# Allegro board AC7200.brd
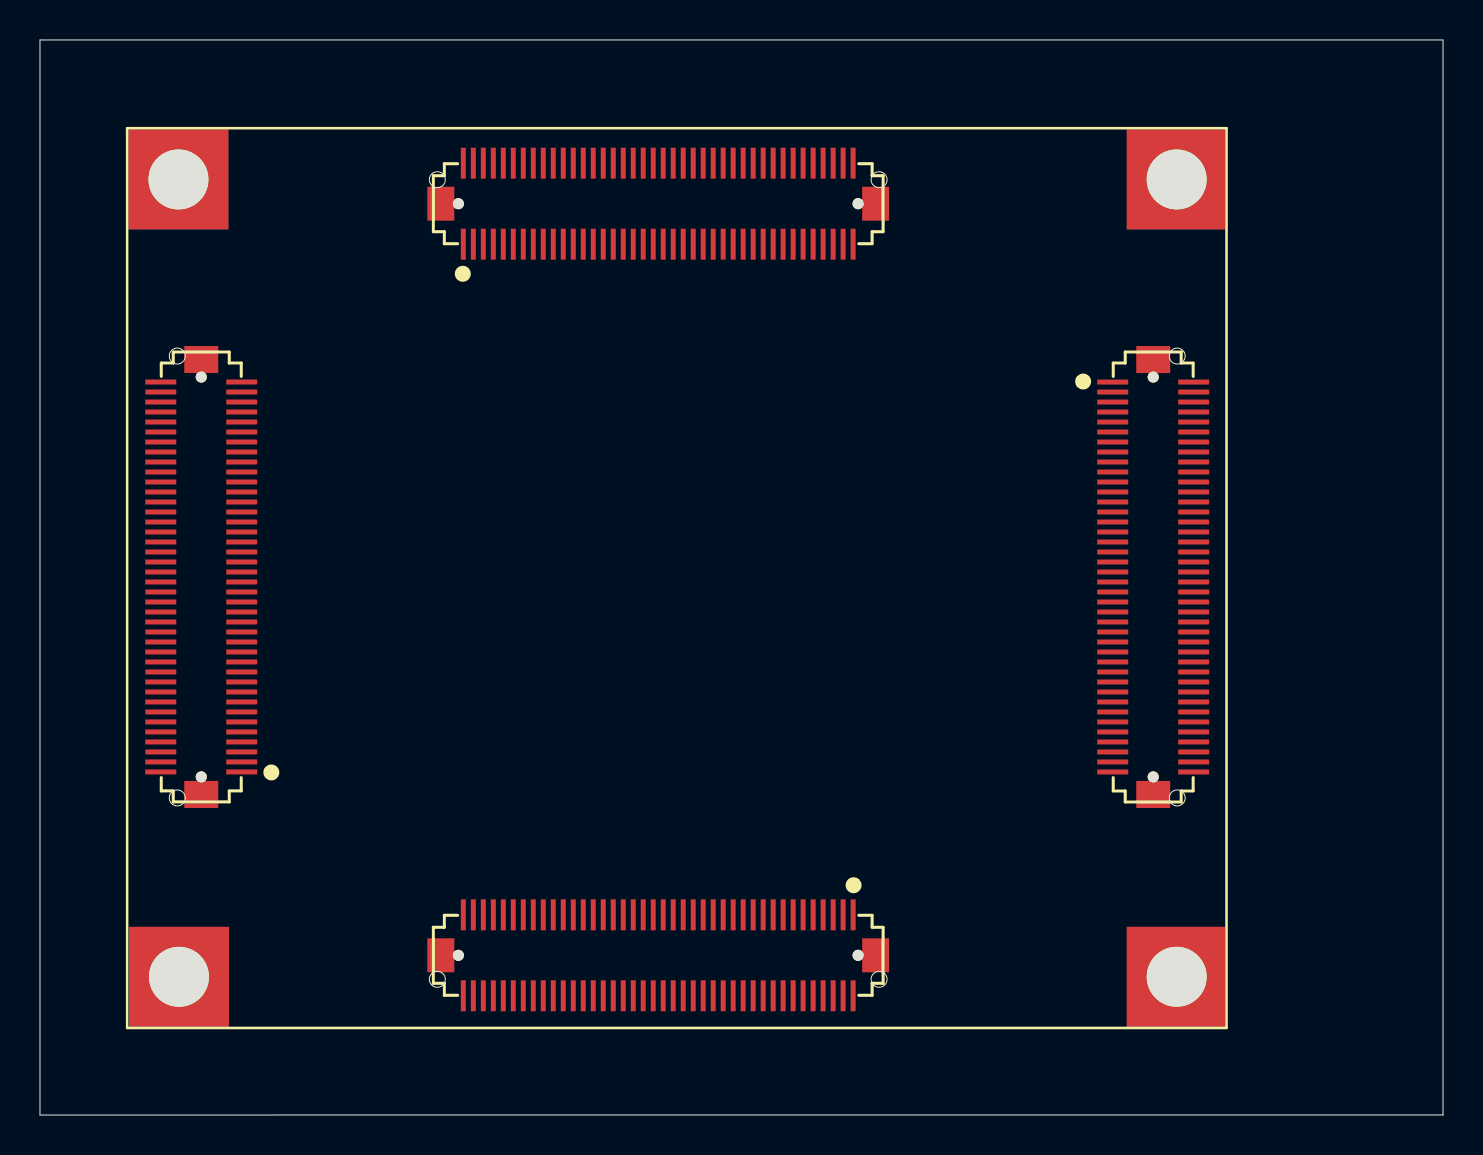
[diagram p0: board, top side]
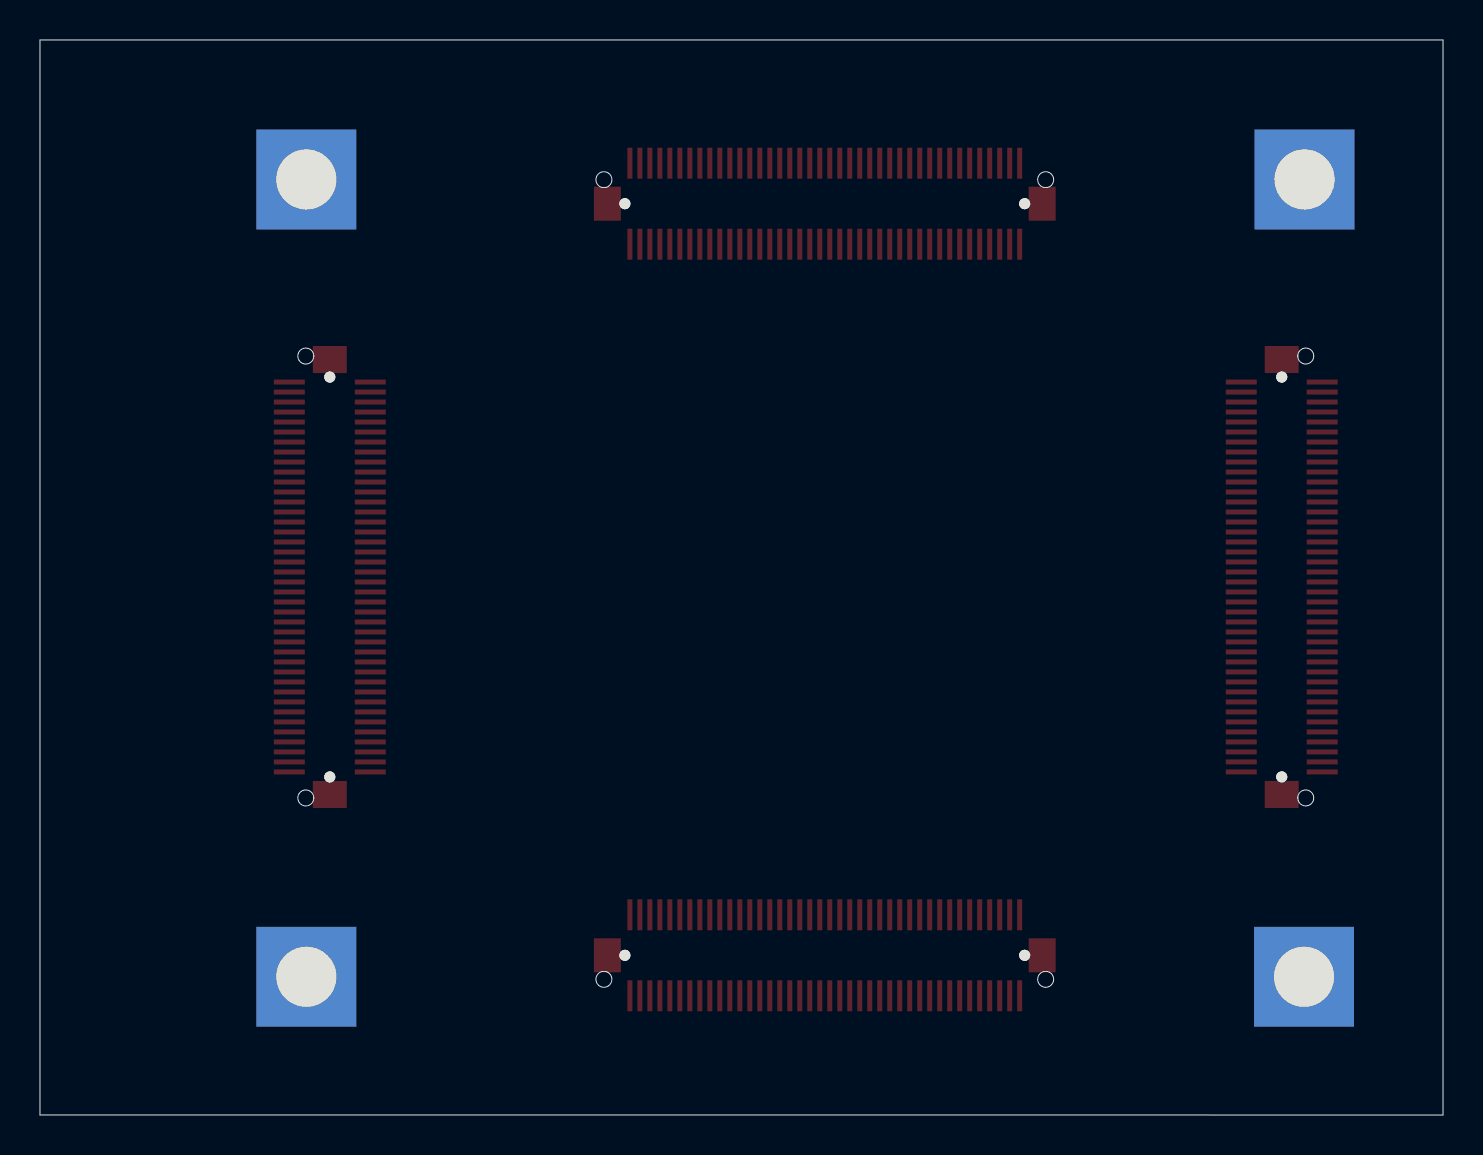
[diagram p1: board, bottom side, seen from below]

Outline 70.19 x 53.77 mm; copper layers: TOP, SGND, SVCC, BOTTOM. Coordinates in mm from the lower left corner of the outline.
Outline path: 0,53.77 70.19,53.77 70.19,0 0,0 0,53.77

## Design rules (mm)
net group B16_L16_N: nets B16_L16_N EX_IO2_16N
net group B16_L16_P: nets B16_L16_P EX_IO2_16P
net group B16_L18_N: nets B16_L18_N EX_IO2_15N
net group B16_L18_P: nets B16_L18_P EX_IO2_15P
net group EX_IO1_1N: nets EX_IO1_1N EX_IO1_1P
net group EX_IO1_2N: nets EX_IO1_2N EX_IO1_2P
net group EX_IO1_3N: nets EX_IO1_3N EX_IO1_3P
net group EX_IO1_4N: nets EX_IO1_4N EX_IO1_4P
net group EX_IO1_5N: nets EX_IO1_5N EX_IO1_5P
net group EX_IO1_6P: nets EX_IO1_6N EX_IO1_6P
net group EX_IO1_7P: nets EX_IO1_7N EX_IO1_7P
net group EX_IO1_8P: nets EX_IO1_8N EX_IO1_8P
net group EX_IO1_9P: nets EX_IO1_9N EX_IO1_9P
net group EX_IO1_10P: nets EX_IO1_10N EX_IO1_10P
net group EX_IO1_11P: nets EX_IO1_11N EX_IO1_11P
net group EX_IO1_12P: nets EX_IO1_12N EX_IO1_12P
net group EX_IO1_13P: nets EX_IO1_13N EX_IO1_13P
net group EX_IO1_14N: nets EX_IO1_14N EX_IO1_14P
net group EX_IO1_15N: nets EX_IO1_15N EX_IO1_15P
net group EX_IO1_16N: nets EX_IO1_16N EX_IO1_16P
net group EX_IO1_17N: nets EX_IO1_17N EX_IO1_17P
net group EX_IO2_1P: nets EX_IO2_1N EX_IO2_1P
net group EX_IO2_2P: nets EX_IO2_2N EX_IO2_2P
net group EX_IO2_3P: nets EX_IO2_3N EX_IO2_3P
net group EX_IO2_4P: nets EX_IO2_4N EX_IO2_4P
net group EX_IO2_5P: nets EX_IO2_5N EX_IO2_5P
net group EX_IO2_6P: nets EX_IO2_6N EX_IO2_6P
net group EX_IO2_7P: nets EX_IO2_7N EX_IO2_7P
net group EX_IO2_8P: nets EX_IO2_8N EX_IO2_8P
net group EX_IO2_9N: nets EX_IO2_9N EX_IO2_9P
net group EX_IO2_10N: nets EX_IO2_10N EX_IO2_10P
net group EX_IO2_11P: nets EX_IO2_11N EX_IO2_11P
net group EX_IO2_12P: nets EX_IO2_12N EX_IO2_12P
net group EX_IO2_13P: nets EX_IO2_13N EX_IO2_13P
net group EX_IO2_14P: nets EX_IO2_14N EX_IO2_14P
net group EX_IO2_17P: nets EX_IO2_17N EX_IO2_17P
net group IO1_1N: nets B15_IO0 B16_IO0
net group IO1_2N: nets B15_L4_N B15_L4_P
net group IO1_3N: nets B15_L2_N_AD8N B15_L2_P_AD8P
net group IO1_4N: nets B16_L23_N B16_L23_P
net group IO1_5N: nets B15_IO25 B16_IO25
net group IO1_6N: nets B16_L21_N B16_L21_P
net group IO1_7N: nets B15_L12_N B15_L12_P
net group IO1_8N: nets B15_L11_N B15_L11_P
net group IO1_9N: nets B16_L22_N B16_L22_P
net group IO1_10P: nets B16_L24_N B16_L24_P
net group IO1_11N: nets B15_L1_N_AD0N B15_L1_P_AD0P
net group IO1_12N: nets B15_L8_N_AD10N B15_L8_P_AD10P
net group IO1_13N: nets B15_L5_N_AD9N B15_L5_P_AD9P
net group IO1_14N: nets B15_L7_N_AD2N B15_L7_P_AD2P
net group IO1_15N: nets B15_L3_N_AD1N B15_L3_P_AD1P
net group IO1_16N: nets B15_L9_N_AD3N B15_L9_P_AD3P
net group IO1_17N: nets B15_L19_N B15_L19_P
net group IO2_1N: nets B13_L4_N B13_L4_P
net group IO2_2N: nets B13_L5_N B13_L5_P
net group IO2_3N: nets B13_L2_N B13_L2_P
net group IO2_4N: nets B13_L1_N B13_L1_P
net group IO2_5N: nets B13_L7_N B13_L7_P
net group IO2_6N: nets B13_L6_N B13_L6_P
net group IO2_7N: nets B13_L3_N B13_L3_P
net group IO2_8N: nets B16_L1_N B16_L1_P
net group IO2_9P: nets B16_L4_N B16_L4_P
net group IO2_10N: nets B16_L6_N B16_L6_P
net group IO2_11N: nets B16_L8_N B16_L8_P
net group IO2_12N: nets B16_L17_N B16_L17_P
net group IO2_13N: nets B16_L13_N B16_L13_P
net group IO2_14N: nets B16_L15_N B16_L15_P
net group IO2_17N: nets B16_L14_N B16_L14_P
net group N32892: nets N32072 N32892
net group N16786323: nets N16786264 N16786323
net group PHY_MDI0_N: nets PHY_MDI0_N PHY_MDI0_P
net group PHY_MDI1_N: nets PHY_MDI1_N PHY_MDI1_P
net group PHY_MDI2_P: nets PHY_MDI2_N PHY_MDI2_P
net group PHY_MDI3_N: nets PHY_MDI3_N PHY_MDI3_P
net group SFP1_RX_P: nets SFP1_RX_N SFP1_RX_P
net group SFP1_TX_P: nets SFP1_TX_N SFP1_TX_P
net group SFP2_RX_N: nets SFP2_RX_N SFP2_RX_P
net group SFP2_TX_P: nets SFP2_TX_N SFP2_TX_P
net group MGT: nets MGT_CLK1_N MGT_CLK1_P MGT_RX0_N MGT_RX0_P MGT_RX1_N MGT_RX1_P MGT_RX2_N MGT_RX2_P MGT_TX0_N MGT_TX0_P MGT_TX1_N MGT_TX1_P MGT_TX2_N MGT_TX2_P MGT_TX3_N MGT_TX3_P

## Placement (name value [footprint] x y rotation side)
CON1  CON40X2_0_8MM  [1000K-F80E-01L-A]  55.69 26.91 270 top
CON2  CON40X2_0_8MM  [1000K-F80E-01L-A]  30.93 45.58 0 top
CON3  CON40X2_0_8MM  [1000K-F80E-01L-A]  8.07 26.91 90 top
CON4  CON40X2_0_8MM  [1000K-F80E-01L-A]  30.93 7.99 180 top
HOLE1  TEST POINT  [FPAD_2]  56.86 6.91 0 top
HOLE2  TEST POINT  [FPAD_2]  6.95 6.91 0 top
HOLE3  TEST POINT  [FPAD_2]  56.86 46.79 0 top
HOLE4  TEST POINT  [FPAD_2]  6.93 46.79 0 top
NOREF  -  []  -50.69 -18.91 0 top
NOREF#2  -  []  244.86 -7.3 0 top
NOREF#3  -  []  -47.04 -23.03 90 top

## Library data of the parts
CON1-CON4 = CON40X2_0_1
HOLE1-HOLE4 = TEST POINT

## Footprints (pads in the part's own frame, mm; a bottom-side part is the same pattern mirrored in y, then rotated)
1000K-F80E-01L-A
  round 0.55 hole 0.55 unplated: (-10,0) (10,0)
  rect 0.25x1.55 smd: 1(-9.75,-2.025) 2(-9.75,2.025) 3(-9.25,-2.025) 4(-9.25,2.025) 5(-8.75,-2.025) 6(-8.75,2.025) 7(-8.25,-2.025) 8(-8.25,2.025) 9(-7.75,-2.025) 10(-7.75,2.025) 11(-7.25,-2.025) 12(-7.25,2.025) 13(-6.75,-2.025) 14(-6.75,2.025) 15(-6.25,-2.025) 16(-6.25,2.025) 17(-5.75,-2.025) 18(-5.75,2.025) 19(-5.25,-2.025) 20(-5.25,2.025) 21(-4.75,-2.025) 22(-4.75,2.025) 23(-4.25,-2.025) 24(-4.25,2.025) 25(-3.75,-2.025) 26(-3.75,2.025) 27(-3.25,-2.025) 28(-3.25,2.025) 29(-2.75,-2.025) 30(-2.75,2.025) 31(-2.25,-2.025) 32(-2.25,2.025) 33(-1.75,-2.025) 34(-1.75,2.025) 35(-1.25,-2.025) 36(-1.25,2.025) 37(-0.75,-2.025) 38(-0.75,2.025) 39(-0.25,-2.025) 40(-0.25,2.025) 41(0.25,-2.025) 42(0.25,2.025) 43(0.75,-2.025) 44(0.75,2.025) 45(1.25,-2.025) 46(1.25,2.025) 47(1.75,-2.025) 48(1.75,2.025) 49(2.25,-2.025) 50(2.25,2.025) 51(2.75,-2.025) 52(2.75,2.025) 53(3.25,-2.025) 54(3.25,2.025) 55(3.75,-2.025) 56(3.75,2.025) 57(4.25,-2.025) 58(4.25,2.025) 59(4.75,-2.025) 60(4.75,2.025) 61(5.25,-2.025) 62(5.25,2.025) 63(5.75,-2.025) 64(5.75,2.025) 65(6.25,-2.025) 66(6.25,2.025) 67(6.75,-2.025) 68(6.75,2.025) 69(7.25,-2.025) 70(7.25,2.025) 71(7.75,-2.025) 72(7.75,2.025) 73(8.25,-2.025) 74(8.25,2.025) 75(8.75,-2.025) 76(8.75,2.025) 77(9.25,-2.025) 78(9.25,2.025) 79(9.75,-2.025) 80(9.75,2.025)
  rect 1.35x1.7 smd: 81(-10.875,0) 84(10.875,0)
FPAD_2
  rect 5x5 hole 3: 1(0,0)

## Nets
+5.0V: CON1.1 CON1.2 CON1.3 CON1.4 CON1.5 CON1.6 CON1.7 CON1.8
GND: CON1.9 CON1.10 CON1.19 CON1.20 CON1.29 CON1.30 CON1.39 CON1.40 CON1.49 CON1.50 CON1.59 CON1.60 CON1.69 CON1.70 CON2.9 CON2.10 CON2.19 CON2.20 CON2.29 CON2.30 CON2.39 CON2.40 CON2.49 CON2.50 CON2.59 CON2.60 CON2.69 CON2.70 CON3.9 CON3.10 CON3.19 CON3.20 CON3.29 CON3.30 CON3.39 CON3.40 CON3.49 CON3.50 CON3.59 CON3.60 CON3.69 CON3.70 CON4.9 CON4.10 CON4.15 CON4.16 CON4.21 CON4.22 CON4.27 CON4.28 CON4.33 CON4.34 CON4.39 CON4.40 CON4.49 CON4.50 CON4.59 CON4.60 CON4.69 CON4.70 HOLE1.1 HOLE2.1 HOLE3.1 HOLE4.1
B13_L1_N: CON1.24
B13_L1_P: CON1.22
B13_L2_N: CON1.28
B13_L2_P: CON1.26
B13_L3_N: CON1.33
B13_L3_P: CON1.31
B13_L4_N: CON1.18
B13_L4_P: CON1.16
B13_L5_N: CON1.23
B13_L5_P: CON1.21
B13_L6_N: CON1.34
B13_L6_P: CON1.32
B13_L7_N: CON1.27
B13_L7_P: CON1.25
B15_IO0: CON3.1
B15_IO25: CON3.2
B15_L1_N_AD0N: CON3.25
B15_L1_P_AD0P: CON3.27
B15_L2_N_AD8N: CON3.13
B15_L2_P_AD8P: CON3.11
B15_L3_N_AD1N: CON3.35
B15_L3_P_AD1P: CON3.37
B15_L4_N: CON3.7
B15_L4_P: CON3.5
B15_L5_N_AD9N: CON3.33
B15_L5_P_AD9P: CON3.31
B15_L7_N_AD2N: CON3.32
B15_L7_P_AD2P: CON3.34
B15_L8_N_AD10N: CON3.26
B15_L8_P_AD10P: CON3.28
B15_L9_N_AD3N: CON3.38
B15_L9_P_AD3P: CON3.36
B15_L11_N: CON3.23
B15_L11_P: CON3.21
B15_L12_N: CON3.17
B15_L12_P: CON3.15
B15_L19_N: CON3.43
B15_L19_P: CON3.41
B16_IO0: CON3.3
B16_IO25: CON3.4
B16_L1_N: CON1.61
B16_L1_P: CON1.63
B16_L4_N: CON1.65
B16_L4_P: CON1.67
B16_L6_N: CON1.71
B16_L6_P: CON1.73
B16_L8_N: CON1.77
B16_L8_P: CON1.75
B16_L13_N: CON4.63
B16_L13_P: CON4.61
B16_L14_N: CON4.64
B16_L14_P: CON4.62
B16_L15_N: CON4.67
B16_L15_P: CON4.65
B16_L16_N: CON4.68
B16_L16_P: CON4.66
B16_L17_N: CON4.73
B16_L17_P: CON4.71
B16_L18_N: CON4.74
B16_L18_P: CON4.72
B16_L21_N: CON3.6
B16_L21_P: CON3.8
B16_L22_N: CON3.18
B16_L22_P: CON3.16
B16_L23_N: CON3.14
B16_L23_P: CON3.12
B16_L24_N: CON3.24
B16_L24_P: CON3.22
E_COL: CON3.68
E_CRS: CON3.72
E_GTXC: CON3.74
E_MDC: CON2.27
E_MDIO: CON2.25
E_RESET: CON3.67
E_RXC: CON3.54
E_RXD0: CON3.44
E_RXD1: CON3.46
E_RXD2: CON3.48
E_RXD3: CON3.52
E_RXD4: CON3.56
E_RXD5: CON3.58
E_RXD6: CON3.62
E_RXD7: CON3.64
E_RXDV: CON3.42
E_RXER: CON3.66
E_TXC: CON3.57
E_TXD0: CON3.71
E_TXD1: CON3.65
E_TXD2: CON3.63
E_TXD3: CON3.61
E_TXD4: CON3.55
E_TXD5: CON3.53
E_TXD6: CON3.51
E_TXD7: CON3.47
E_TXEN: CON3.73
E_TXER: CON3.45
FPGA_TCK: CON3.77
FPGA_TDI: CON3.78
FPGA_TDO: CON3.79
FPGA_TMS: CON3.80
I2C_SCL: CON2.45
I2C_SDA: CON2.47
KEY1: CON4.57
KEY2: CON4.55
KEY3: CON4.53
KEY4: CON4.51
LED1: CON4.58
LED2: CON4.56
LED3: CON2.41
LED4: CON2.43
MGT_CLK1_N: CON4.38
MGT_CLK1_P: CON4.36
MGT_RX0_N: CON4.32
MGT_RX0_P: CON4.30
MGT_RX1_N: CON4.37
MGT_RX1_P: CON4.35
MGT_RX2_N: CON4.20
MGT_RX2_P: CON4.18
MGT_RX3_N: CON4.25
MGT_RX3_P: CON4.23
MGT_TX0_N: CON4.26
MGT_TX0_P: CON4.24
MGT_TX1_N: CON4.31
MGT_TX1_P: CON4.29
MGT_TX2_N: CON4.14
MGT_TX2_P: CON4.12
MGT_TX3_N: CON4.19
MGT_TX3_P: CON4.17
RTC_DATA: CON4.41
RTC_RESET: CON4.43
RTC_SCLK: CON4.45
SD_CD_N: CON4.47
SD_CLK: CON4.46
SD_CMD: CON4.48
SD_DAT0: CON4.44
SD_DAT1: CON4.42
SD_DAT2: CON4.54
SD_DAT3: CON4.52
SFP1_LOSS: CON4.78
SFP1_TX_DIS: CON4.76
SFP2_LOSS: CON4.75
SFP2_TX_DIS: CON4.77
UART1_RXD: CON2.23
UART1_TXD: CON2.21
UART2_RXD: CON2.35
UART2_TXD: CON2.37
USB_CLKOUT: CON2.55
USB_FD0: CON2.48
USB_FD1: CON2.52
USB_FD2: CON2.54
USB_FD3: CON2.56
USB_FD4: CON2.58
USB_FD5: CON2.62
USB_FD6: CON2.64
USB_FD7: CON2.66
USB_FD8: CON2.75
USB_FD9: CON2.73
USB_FD10: CON2.71
USB_FD11: CON2.67
USB_FD12: CON2.65
USB_FD13: CON2.63
USB_FD14: CON2.61
USB_FD15: CON2.57
USB_FIFOADR0: CON2.78
USB_FIFOADR1: CON2.80
USB_FLAGA: CON2.68
USB_FLAGB: CON2.72
USB_FLAGC: CON2.74
USB_IFCLK: CON2.46
USB_PKTEND: CON2.79
USB_SLCS: CON2.77
USB_SLOE: CON2.76
USB_SLRD: CON2.53
USB_SLWR: CON2.51
VGA_B0: CON2.24
VGA_B1: CON2.26
VGA_B2: CON2.28
VGA_B3: CON2.32
VGA_B4: CON2.34
VGA_B5: CON2.36
VGA_B6: CON2.38
VGA_B7: CON2.42
VGA_CLK: CON2.44
VGA_EN: CON2.22
VGA_G0: CON2.2
VGA_G1: CON2.4
VGA_G2: CON2.6
VGA_G3: CON2.8
VGA_G4: CON2.12
VGA_G5: CON2.14
VGA_G6: CON2.16
VGA_G7: CON2.18
VGA_HS: CON2.31
VGA_R0: CON2.17
VGA_R1: CON2.15
VGA_R2: CON2.13
VGA_R3: CON2.11
VGA_R4: CON2.7
VGA_R5: CON2.5
VGA_R6: CON2.3
VGA_R7: CON2.1
VGA_VS: CON2.33
XADC_VN: CON1.51
XADC_VP: CON1.53
N16885862: CON1.37
N16885865: CON1.45
N16885868: CON1.47
N16885913: CON1.43
N16885916: CON1.41
N16886413: CON1.58
N16886416: CON1.56
N16886419: CON1.46
N16886422: CON1.48
N16886425: CON1.36
N16886428: CON1.38
N16886443: CON1.44
N16886446: CON1.42
N16886449: CON1.54
N16955879: CON1.35

Pads without a net: CON1 11 12 13 14 15 17 52 55 57 62 64 66 68 72 74 76 78 79 80 81 84; CON2 81 84; CON3 75 76 81 84; CON4 1 2 3 4 5 6 7 8 11 13 79 80 81 84

## Text on the board
User.11: 10.CONTROLLED IMPENDANCE 50 OHM/40 OHM +/-10% | 6.TOLERANCE: HOLES DIAMETER {NPTH} +/-0.003" | 7.LINE WIDTH/SPACING: +/-20% | 8.ALL VIAS ARE TENTED | 9.CONTROLLED DIFFERENTAIL IMPEDANCE 100 OHM/80 OHM/90 OHM +/-10% | {EDGE TO EDGE/CENTRE TO EDGE} +/-0.005" | LINE WITH IMPEDANCE CHART FOR REFERENCE | HOLES {CENTRE TO CENTRE} +/-0.003" | OUTLINE {DATUM TO HOLES} +/-0.003" | L1 | L4 | L2 | L3 | (GND) | (POWER) | LAYER 1      L1 TOP | LAYER 2      L2 GND | LAYER 3      L3 VCC | LAYER 4      L4 BOTTOM | {DATUM TO EDGE} +/-0.005" | SINGLE ENDED | 50ohm | WIDTH | - | TOP SIDE | GOLD 0.05um MINIMUM | {PTH} +/-0.003" | (WIDTH/SPACE) | 6mil/8mil | 3.5mil/12mil | DIFF-PAIR | 100ohm | 0.5oz | 1oz
User.45: FIGURE | SIZE | 8.0 | 12.0 | 20.0 | 35.0 | 35.04 | 35.43 | 39.37 | 40.0 | 40.94 | 42.0 | 43.31 | 51.18 | 62.0 | 70.87 | 118.11 | 120.0 | 130.0 | 137.8 | 21.66 | 38.0 | 129.92 | 62.0x39.37 | 102.36x31.5 | DRILL CHART | ALL UNITS ARE IN MILS | TOLERANCE | +3.0/-3.0 | PLATED | NON-PLATED | QTY | 58 | 508 | 2 | 89 | 10 | 6 | 15 | 22 | 1 | 5 | 4 | 8 | 18
